# Altium PCB PCB1.PcbDoc (part 1 of 2)
Units mm, origin at the board's own origin, x right, y up, seen from the top; angles counter-clockwise.
Board outline 173.55 x 37.01 mm, 2 copper layers (Top Layer, Bottom Layer); 69 components, 61 nets, 220 pads, 230 vias.
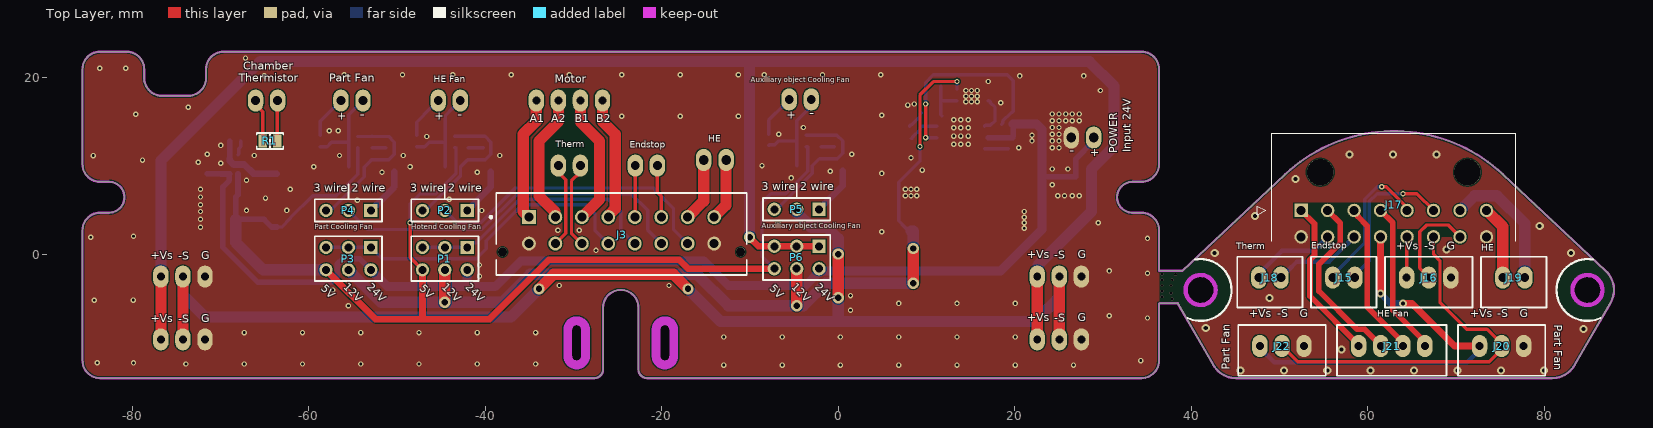
[diagram p0: Top Layer view]
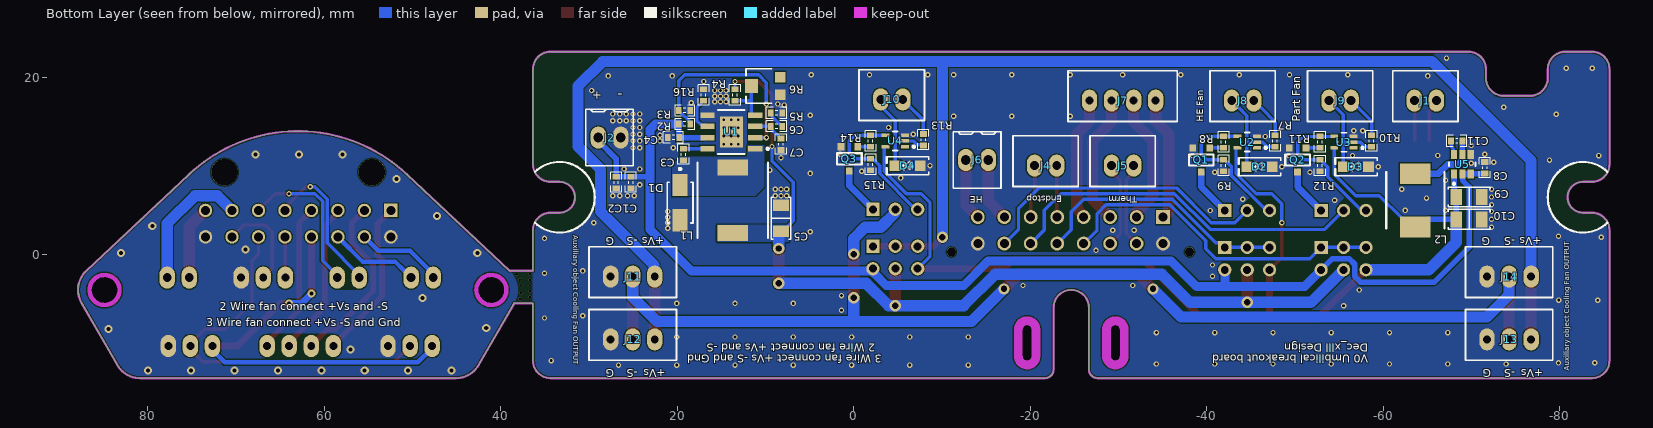
[diagram p1: Bottom Layer view, seen from below]
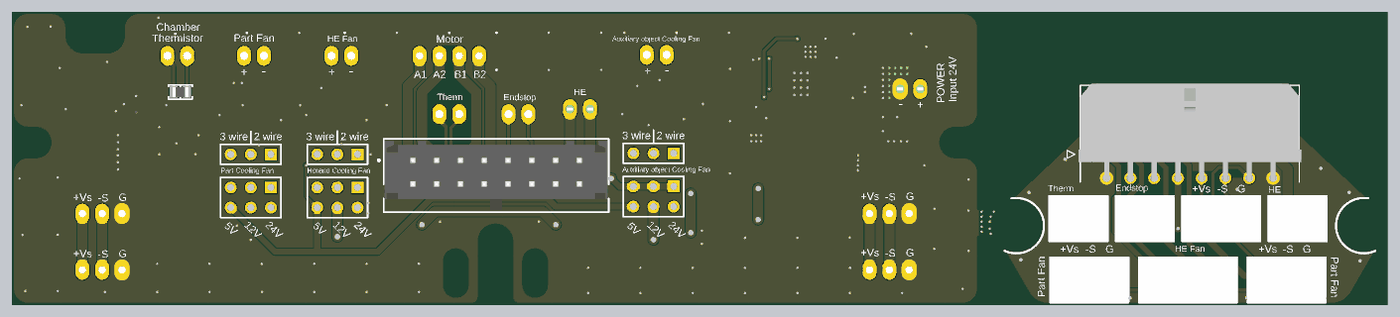
[diagram p3: 3D render of the assembled board from above, using the file's embedded part models]

## Layer stack, top to bottom
Top Solder: solder mask 0.0102, Solder Resist, Dk 3.5
Top Layer: signal copper 0.0356
Dielectric 1: dielectric 0.32, FR-4, Dk 4.8
Bottom Layer: signal copper 0.0356
Bottom Solder: solder mask 0.0102, Solder Resist, Dk 3.5

## Board outline
-85.638,-12.055 -85.638,2.695 cw(c-83.638,2.695) -83.638,4.695 -82.638,4.695 ccw(c-82.638,6.445) -82.638,8.195 -83.638,8.195 cw(c-83.638,10.195) -85.638,10.195 -85.638,20.945 cw(c-83.638,20.945) -83.638,22.945 -80.638,22.945 cw(c-80.638,20.945) -78.638,20.945 -78.638,19.945 ccw(c-76.638,19.945) -76.638,17.945 -73.638,17.945 ccw(c-73.638,19.945) -71.638,19.945 -71.638,20.945 cw(c-69.638,20.945) -69.638,22.945 34.362,22.945 cw(c34.362,20.945) 36.362,20.945 36.362,10.195 cw(c34.362,10.195) 34.362,8.195 33.362,8.195 ccw(c33.362,6.445) 33.362,4.695 34.362,4.695 cw(c34.362,2.695) 36.362,2.695 36.362,-1.876 39.019,-1.876 50.674,9.062 cw(c62.992,-4.064) 75.31,9.061 86.965,-1.876 cw(c84.912,-4.064) 87.51,-5.564 83.469,-12.564 cw(c80.871,-11.064) 80.871,-14.064 45.113,-14.064 cw(c45.113,-11.064) 42.515,-12.564 38.474,-5.564 38.481,-5.588 36.362,-5.588 36.362,-12.055 cw(c34.362,-12.055) 34.362,-14.055 -21.638,-14.055 cw(c-21.638,-13.055) -22.638,-13.055 -22.638,-6.055 ccw(c-24.638,-6.055) -26.638,-6.055 -26.638,-13.055 cw(c-27.638,-13.055) -27.638,-14.055 -83.638,-14.055 cw(c-83.638,-12.055)
cut-out: 39.372,-4.064 ccw(c41.072,-4.064) 41.072,-5.764 ccw(c41.072,-4.064) 42.772,-4.064 ccw(c41.072,-4.064) 41.072,-2.364 ccw(c41.072,-4.064)
cut-out: 83.212,-4.064 ccw(c84.912,-4.064) 84.912,-5.764 ccw(c84.912,-4.064) 86.612,-4.064 ccw(c84.912,-4.064) 84.912,-2.364 ccw(c84.912,-4.064)
cut-out: -20.638,-11.555 ccw(c-19.638,-11.555) -18.638,-11.555 -18.638,-8.555 ccw(c-19.638,-8.555) -20.638,-8.555
cut-out: -30.638,-11.555 ccw(c-29.638,-11.555) -28.638,-11.555 -28.638,-8.555 ccw(c-29.638,-8.555) -30.638,-8.555

## Design rules (kind name [scope] priority, off if disabled: settings)
Clearance "Stitching GND" [IsStitchingVia and InNet('GND') vs (IsVia and (Not IsStitchingVia)) Or IsPad] p1: gap=0.127 ignorepadtopadclearanceinfootprint=FALSE
Clearance Clearance_1 [InNamedPolygon('GND_L01_P008')] p2: gap=0.127 ignorepadtopadclearanceinfootprint=FALSE
Clearance Polygon_ANT [(InNamedPolygon('Top_Layer-GND')) or (InNamedPolygon('Bottom_Layer-GND')) vs InNet('RF')] p3: gap=0.127 ignorepadtopadclearanceinfootprint=FALSE except(0: Arc-Hole Track-Hole SMDPad-Hole THPad-Hole Via-Hole Fill-Hole Poly-Hole Region-Hole Text-Hole)
Clearance Polygon [(InNamedPolygon('Top_Layer-GND')) or (InNamedPolygon('Bottom_Layer-GND'))] p4: gap=0.127 ignorepadtopadclearanceinfootprint=FALSE
Clearance [All] p5: gap=0.127 ignorepadtopadclearanceinfootprint=FALSE
ComponentClearance [All] p1 off: gap=0.254 collisioncheckmode=3 verticalgap=0.254 showdistances=FALSE
DiffPairsRouting DiffPairsRouting_1 [InDifferentialPair ('SWD')] p1: maxlimit=0.254 minlimit=0.254 mostfreqgap=0.254 toplayer_minwidth=0.152 toplayer_maxwidth=0.305 toplayer_prefwidth=0.229 bottomlayer_minwidth=0.152 bottomlayer_maxwidth=0.305 bottomlayer_prefwidth=0.229 maxuncoupledlength=12.7
DiffPairsRouting [All] p2: maxlimit=0.254 minlimit=0.152 mostfreqgap=0.229 toplayer_minwidth=0.152 toplayer_maxwidth=0.305 toplayer_prefwidth=0.229 bottomlayer_minwidth=0.152 bottomlayer_maxwidth=0.305 bottomlayer_prefwidth=0.229 maxuncoupledlength=12.7
FabricationTestPointUsage TestPointUsage [All] p1: valid=0 allowmultiple=FALSE
FabricationTestpoint Testpoint [All] p1: side=3 testpointundercomponent=TRUE minsize=1.016 maxsize=2.54 preferedsize=1.524 minholesize=0 maxholesize=1.016 preferedholesize=0.813 testpointgrid=0.025 allowsidetop=TRUE allowsidebottom=TRUE usegrid=TRUE gridtolerance=0
Height [All] p1 off: minheight=0 maxheight=25.4 prefheight=12.7
HoleSize [All] p1: absolutevalues=TRUE maxlimit=4.064 minlimit=0.305 maxpercent=80.000 minpercent=20.000
LayerPairs [All] p1 off: enforce=TRUE
MatchedLengths [InDifferentialPair ('SWD')] p1: tolerance=25.4 checknetsindiffpair=TRUE checkdiffpairvsdiffpair=FALSE checkxsignals=FALSE checkothers=FALSE
MinimumAnnularRing [All] p1 off: minimumring=0.152
PolygonConnect PolygonConnect_24 [All vs IsNamedPolygon('NONET_L-01_P-001')] p1: connectstyle=Direct reliefconductorwidth=0.254 reliefentries=4 polygonreliefangle="90 Angle" airgapwidth=0.254
PolygonConnect PolygonConnect_23 [All vs IsNamedPolygon('NONET_L-01_P-001')] p2: connectstyle=Direct reliefconductorwidth=0.254 reliefentries=4 polygonreliefangle="90 Angle" airgapwidth=0.254
PolygonConnect PolygonConnect_1 [All vs IsNamedPolygon('NONET_L-01_P-001')] p3: connectstyle=Direct reliefconductorwidth=0.254 reliefentries=4 polygonreliefangle="90 Angle" airgapwidth=0.254
PolygonConnect PolygonConnect_22 [All vs IsNamedPolygon('NONET_L04_P024')] p4: connectstyle=Direct reliefconductorwidth=0.254 reliefentries=4 polygonreliefangle="90 Angle" airgapwidth=0.254
PolygonConnect PolygonConnect_21 [All vs IsNamedPolygon('NONET_L03_P028')] p5: connectstyle=Direct reliefconductorwidth=0.254 reliefentries=4 polygonreliefangle="90 Angle" airgapwidth=0.254
PolygonConnect PolygonConnect_20 [All vs IsNamedPolygon('NONET_L02_P026')] p6: connectstyle=Direct reliefconductorwidth=0.254 reliefentries=4 polygonreliefangle="90 Angle" airgapwidth=0.254
PolygonConnect PolygonConnect_19 [All vs IsNamedPolygon('NONET_L01_P023')] p7: connectstyle=Direct reliefconductorwidth=0.254 reliefentries=4 polygonreliefangle="90 Angle" airgapwidth=0.254
PolygonConnect PolygonConnect_18 [All vs IsNamedPolygon('NONET_L02_P024')] p8: connectstyle=Direct reliefconductorwidth=0.254 reliefentries=4 polygonreliefangle="90 Angle" airgapwidth=0.254
PolygonConnect PolygonConnect_17 [All vs IsNamedPolygon('NONET_L02_P022')] p9: connectstyle=Direct reliefconductorwidth=0.254 reliefentries=4 polygonreliefangle="90 Angle" airgapwidth=0.254
PolygonConnect PolygonConnect_16 [All vs IsNamedPolygon('NONET_L01_P020')] p10: connectstyle=Direct reliefconductorwidth=0.254 reliefentries=4 polygonreliefangle="90 Angle" airgapwidth=0.254
PolygonConnect PolygonConnect_15 [All vs IsNamedPolygon('NONET_L02_P018')] p11: connectstyle=Direct reliefconductorwidth=0.254 reliefentries=4 polygonreliefangle="90 Angle" airgapwidth=0.254
PolygonConnect PolygonConnect_14 [All vs IsNamedPolygon('NONET_L01_P020')] p12: connectstyle=Direct reliefconductorwidth=0.254 reliefentries=4 polygonreliefangle="90 Angle" airgapwidth=0.254
PolygonConnect PolygonConnect_13 [All vs IsNamedPolygon('NONET_L02_P018')] p13: thpad.connectstyle=NoConnect thpad.reliefconductorwidth=0.254 thpad.reliefentries=4 thpad.polygonreliefangle="90 Angle" thpad.airgapwidth=0.254 smdpad.connectstyle=Direct smdpad.reliefconductorwidth=0.254 smdpad.reliefentries=4 smdpad.polygonreliefangle="90 Angle" smdpad.airgapwidth=0.254 via.connectstyle=Direct via.reliefconductorwidth=0.254 via.reliefentries=4 via.polygonreliefangle="90 Angle" via.airgapwidth=0.254
PolygonConnect PolygonConnect_12 [All vs IsNamedPolygon('NONET_L01_P016')] p14: connectstyle=Direct reliefconductorwidth=0.254 reliefentries=4 polygonreliefangle="90 Angle" airgapwidth=0.254
PolygonConnect PolygonConnect_11 [All vs IsNamedPolygon('GND_L01_P008')] p15: connectstyle=Direct reliefconductorwidth=0.254 reliefentries=4 polygonreliefangle="90 Angle" airgapwidth=0.254
PolygonConnect PolygonConnect_10 [All vs IsNamedPolygon('GND_L01_P008')] p16: thpad.connectstyle=NoConnect thpad.reliefconductorwidth=0.254 thpad.reliefentries=4 thpad.polygonreliefangle="90 Angle" thpad.airgapwidth=0.254 smdpad.connectstyle=Direct smdpad.reliefconductorwidth=0.254 smdpad.reliefentries=4 smdpad.polygonreliefangle="90 Angle" smdpad.airgapwidth=0.254 via.connectstyle=Direct via.reliefconductorwidth=0.254 via.reliefentries=4 via.polygonreliefangle="90 Angle" via.airgapwidth=0.254
PolygonConnect PolygonConnect_9 [All vs IsNamedPolygon('VUSB_L01_P010')] p17: connectstyle=Direct reliefconductorwidth=0.254 reliefentries=4 polygonreliefangle="90 Angle" airgapwidth=0.254
PolygonConnect PolygonConnect_8 [All vs IsNamedPolygon('GND_L01_P008')] p18: connectstyle=Direct reliefconductorwidth=0.254 reliefentries=4 polygonreliefangle="90 Angle" airgapwidth=0.254
PolygonConnect PolygonConnect_7 [All vs IsNamedPolygon('NONET_L02_P014')] p19: connectstyle=Direct reliefconductorwidth=0.254 reliefentries=4 polygonreliefangle="90 Angle" airgapwidth=0.254
PolygonConnect PolygonConnect_6 [All vs IsNamedPolygon('GND_L02_P006')] p20: connectstyle=Direct reliefconductorwidth=0.254 reliefentries=4 polygonreliefangle="90 Angle" airgapwidth=0.254
PolygonConnect PolygonConnect_5 [All vs IsNamedPolygon('GND_L01_P004')] p21: connectstyle=Direct reliefconductorwidth=0.254 reliefentries=4 polygonreliefangle="90 Angle" airgapwidth=0.254
PolygonConnect PolygonConnect_4 [All vs IsNamedPolygon('Top Layer-NetR6_2')] p22: connectstyle=Direct reliefconductorwidth=0.254 reliefentries=4 polygonreliefangle="90 Angle" airgapwidth=0.254
PolygonConnect PolygonConnect_3 [All vs IsNamedPolygon('1')] p23: connectstyle=Direct reliefconductorwidth=0.254 reliefentries=4 polygonreliefangle="90 Angle" airgapwidth=0.254
PolygonConnect PolygonConnect_2 [All vs IsNamedPolygon('Top Layer-GND')] p24: connectstyle=Direct reliefconductorwidth=0.254 reliefentries=4 polygonreliefangle="90 Angle" airgapwidth=0.254
PolygonConnect [All] p25: connectstyle=Relief reliefconductorwidth=0.254 reliefentries=4 polygonreliefangle="90 Angle" airgapwidth=0.254
RoutingVias [All] p1: holewidth=0.406 width=0.813 viastyle="Through Hole" minholewidth=0.254 minwidth=0.254 maxholewidth=0.711 maxwidth=1.27
SilkToSolderMaskClearance SilkscreenOverComponentPads [IsPad] p1: minsilkscreentomaskgap=0.254 clearancetoexposedcopper=TRUE
SolderMaskExpansion [All] p1: expansion=0.076 istentingtop=FALSE
Width [All] p1: maxlimit=1.524 minlimit=0.152 preferedwidth=0.381
22 further rules are at their usual default settings.

## Classes and differential pairs
component class Minor_board: J15 J16 J17 J18 J19 J20 J21 J22
component class main_board: C1 C2 C3 C4 C5 C6 C7 C8 C9 C10 C11 D1 D2 D3 D4 J1 J2 J3 J4 J5 J6 J7 J8 J9 J10 J11 J12 J13 J14 L1 L2 P1 P2 P3 P4 P5 P6 Q1 Q2 Q3 R1 R2 R3 R4 R5 R6 R7 R8 R9 R10 R11 R12 R13 R14 R15 R16 U1 U2 U3 U4 U5

## Components (designator, comment, footprint, x,y, rotation, side; value= is the part's Value field where it differs from the comment)
C1 "1uF" "0603 R" 25.273,8.128 r180 bottom
C2 "0.1uF" "0603 R" 26.924,8.128 r180 bottom
C3 "100nF" "0603 R" 19.304,11.303 r180 bottom
C4 "10uF/50V" "0603 R" 20.447,13.208 r270 bottom
C5 "22 µF" "CAP 1206_3216 - 0.8MM" 8.255,4.064 r270 bottom
C6 "150pF" "0603 R" 8.763,14.478 r90 bottom
C7 "NS" "0603 R" 8.255,12.446 r180 bottom
C8 "10uF/50V" "0603 R" -71.501,9.779 r0 bottom
C9 "22 µF" "CAP 1206_3216 - 0.8MM" -69.723,6.477 r0 bottom
C10 "22 µF" "CAP 1206_3216 - 0.8MM" -69.723,3.937 r0 bottom
C11 "100nF" "0603 R" -68.326,12.827 r270 bottom
D1 "B340A-13-F" FP-SMA-MFG 19.685,5.842 r270 bottom
D2 "KDZVTR3.0B" SOD123F -45.974,9.906 r0 bottom
D3 "KDZVTR3.0B" SOD123F -56.896,9.906 r0 bottom
D4 "KDZVTR3.0B" SOD123F -6.096,10.033 r0 bottom
J1 "B2B-XH-A(LF)(SN)" "JST XH B2B-XH-A" -64.77,17.399 r0 bottom
J2 "282834-2" "TE 282834-2" 27.686,13.208 r180 bottom
J3 "43045-1612" FP-43045-1612-MFG -24.549,2.279 r180 top
J4 "B2B-XH-A(LF)(SN)" "JST XH B2B-XH-A" -21.737,10.033 r0 bottom
J5 "B2B-XH-A(LF)(SN)" "JST XH B2B-XH-A" -30.46,10.033 r0 bottom
J6 "282834-2" "TE 282834-2" -13.97,10.668 r180 bottom
J7 "B4B-XH-A(LF)(SN)" "JST XH B4B-XH-A" -30.46,17.399 r0 bottom
J8 "B2B-XH-A(LF)(SN)" "JST XH B2B-XH-A" -44.069,17.399 r0 bottom
J9 "B2B-XH-A(LF)(SN)" "JST XH B2B-XH-A" -55.098,17.399 r0 bottom
J10 "B2B-XH-A(LF)(SN)" "JST XH B2B-XH-A" -4.298,17.526 r0 bottom
J11 "B3B-XH-A(LF)(SN)" "JST XH B3B-XH-A" 25.059,-2.54 r0 bottom
J12 "B3B-XH-A(LF)(SN)" "JST XH B3B-XH-A" 25.059,-9.652 r0 bottom
J13 "B3B-XH-A(LF)(SN)" "JST XH B3B-XH-A" -74.255,-9.652 r0 bottom
J14 "B3B-XH-A(LF)(SN)" "JST XH B3B-XH-A" -74.255,-2.54 r0 bottom
J15 "B2B-XH-A(LF)(SN)" "JST XH B2B-XH-A" 57.297,-2.667 r0 top locked
J16 "B3B-XH-A(LF)(SN)" "JST XH B3B-XH-A" 66.929,-2.667 r0 top locked
J17 "43045-1600" 43045-16(00,01,02,10) 52.468,4.953 r180 top locked
J18 "B2B-XH-A(LF)(SN)" "JST XH B2B-XH-A" 48.915,-2.667 r0 top locked
J19 "B2B-XH-A(LF)(SN)" "JST XH B2B-XH-A" 76.561,-2.667 r0 top locked
J20 "B3B-XH-A(LF)(SN)" "JST XH B3B-XH-A" 75.184,-10.414 r0 top locked
J21 "B4B-XH-A(LF)(SN)" "JST XH B4B-XH-A" 62.738,-10.414 r0 top locked
J22 "B3B-XH-A(LF)(SN)" "JST XH B3B-XH-A" 50.292,-10.414 r0 top locked
L1 "22uH" "0850 I" 13.716,6.096 r90 bottom
L2 "4.7uH" "0630 I" -63.627,6.096 r270 bottom
P1 "Header 3X2" HDR2X3 -42.037,0.762 r180 top
P2 "Header 3" HDR1X3 -42.037,4.953 r180 top
P3 "Header 3X2" HDR2X3 -52.959,0.762 r180 top
P4 "Header 3" HDR1X3 -52.959,4.953 r180 top
P5 "Header 3" HDR1X3 -2.159,5.08 r180 top
P6 "Header 3X2" HDR2X3 -2.159,0.889 r180 top
Q1 "ACE3400" SOT23-3 -39.37,10.668 r0 bottom
Q2 "ACE3400" SOT23-3 -50.292,10.668 r0 bottom
Q3 "ACE3400" SOT23-3 0.508,10.795 r0 bottom
R1 "10k" "NTC 0805_2012" -64.389,12.827 r180 top
R2 "47K" "0603 R" 19.177,14.732 r270 bottom
R3 "3.3K" "0603 R" 19.177,16.256 r270 bottom
R4 "56K" "0603 R" 13.462,18.034 r180 bottom
R5 "147K" "0603 R" 8.763,16.002 r270 bottom
R6 "TC33X-2-502E" FP-TC33X-2-MFG 10.033,19.05 r90 bottom
R7 "560R" "0603 R" -47.752,12.827 r180 bottom
R8 "10R" "0603 R" -41.91,12.7 r180 bottom
R9 "20K" "0603 R" -41.91,10.048 r180 bottom
R10 "560R" "0603 R" -58.674,12.827 r180 bottom
R11 "10R" "0603 R" -52.832,12.7 r180 bottom
R12 "20K" "0603 R" -52.832,10.033 r180 bottom
R13 "560R" "0603 R" -7.874,12.954 r180 bottom
R14 "10R" "0603 R" -1.905,12.827 r180 bottom
R15 "20K" "0603 R" -1.905,10.16 r180 bottom
R16 "100K" "0603 R" 17.018,18.034 r180 bottom
U1 "MP1584EN-LF-Z" FP-MP1584EN-LF-Z-MFG 13.876,13.843 r0 bottom
U2 "SN74AHC1G04DCKR" FP-DCK0005A-MFG -44.577,12.7 r0 bottom
U3 "SN74AHC1G04DCKR" FP-DCK0005A-MFG -55.542,12.685 r0 bottom
U4 "SN74AHC1G04DCKR" FP-DCK0005A-MFG -4.699,12.827 r0 bottom
U5 "AP63205WU-7" FP-TSOT26-MFG -68.961,10.176 r90 bottom

## Footprints (in the part's own frame and the unit in brackets; to place one, negate y for a bottom-side part, rotate by r counter-clockwise, add the part's x,y. Pads: shape width x height; smd on the part's side, far side on the other; paste and mask are expansions set on the pad)
"0603 R" [mm] "1/10W"
  rect 0.8x0.65 smd mask+0.1: 1(0,-0.65) 2(0,0.65)
  silkscreen extent -0.64,-1.14 0.64,1.14, body extent -0.4,-0.8 0.4,0.8, height 0.4
"0630 I" [mm] "Inductor"
  rect 2.35x3.5 smd: 1(-3.025,0) 2(3.025,0)
  silkscreen extent -3.18,-3.3 3.18,3.3, body extent -3.18,-3.3 3.18,3.3, height 3
"0850 I" [mm]
  rect 1.8x3.5 smd: 1(3.7,0) 2(-3.7,0)
  silkscreen extent -4.25,-4 4.25,4, body extent -4.28,-4 4.28,4, height 5
43045-16(00,01,02,10) [mm]
  rect 1.52x1.52 hole 1.02: 1(0,0)
  round 1.52 hole 1.02: 2(-3,0) 3(-6,0) 4(-9,0) 5(-12,0) 6(-15,0) 7(-18,0) 8(-21,0) 9(0,3) 10(-3,3) 11(-6,3) 12(-9,3) 13(-12,3) 14(-15,3) 15(-18,3) 16(-21,3)
  round 3 hole 3 unplated: 17(-2.16,-4.32) 18(-18.84,-4.32)
  silkscreen extent -24.33,-8.72 5,3.52, body extent -24.58,-8.92 3.57,3.31, height 8.27
"CAP 1206_3216 - 0.8MM" [mm] "Chip Capacitor, 2-Leads, Body 3.25x1.60mm, IPC Medium Density"
  rect 1.3x1.8 smd: 1(-1.45,0) 2(1.45,0)
  silkscreen extent -2.38,-1.12 2.37,1.12, body extent -1.6,-0.8 1.6,0.8, height 0.8
FP-43045-1612-MFG [mm]
  rect 1.57x1.57 hole 1.02 paste-1000 mask+0: 1(10.5,-1.915)
  round 1.57 hole 1.02 paste-1000 mask+0: 2(7.5,-1.915) 3(4.5,-1.915) 4(1.5,-1.915) 5(-1.5,-1.915) 6(-4.5,-1.915) 7(-7.5,-1.915) 8(-10.5,-1.915) 9(10.5,1.085) 10(7.5,1.085) 11(4.5,1.085) 12(1.5,1.085) 13(-1.5,1.085) 14(-4.5,1.085) 15(-7.5,1.085) 16(-10.5,1.085)
  round 1.02 hole 1.02 unplated paste-1000 mask+0: ""(-13.5,2.025) ""(13.5,2.025)
  silkscreen extent -14.2,-4.63 14.92,4.63, body extent -14.3,-4.74 14.3,4.73, height 0.25
FP-DCK0005A-MFG [mm]
  rect 0.9x0.4 smd paste-1000 mask+0: 1(-1.1,0.65) 2(-1.1,0) 3(-1.1,-0.65) 4(1.1,-0.65) 5(1.1,0.65)
  silkscreen extent -2.22,-1.07 0.7,1.07, body extent -1.1,-1 1.1,1, height 1.1
FP-MP1584EN-LF-Z-MFG [mm]
  rect 1.6x0.61 smd paste+0 mask+0: 1(-2.7,1.905) 2(-2.7,0.635) 3(-2.7,-0.635) 4(-2.7,-1.905) 5(2.7,-1.905) 6(2.7,-0.635) 7(2.7,0.635) 8(2.7,1.905)
  rect 2.62x3.51 smd paste+0 mask+0: 9(0,0)
  silkscreen extent -4.22,-2.5 1.53,2.5, body extent -3.1,-2.51 3.1,2.49, height 1.7
FP-SMA-MFG [mm]
  rect 2.5x1.7 smd mask+0: 1(-2,0)
  rect 2.5x1.7 smd paste+0 mask+0: 2(2,0)
  silkscreen extent -3.92,-1.46 2.3,1.46, body extent -2.6,-1.3 2.6,1.3, height 2.4
FP-TC33X-2-MFG [mm]
  rect 1.2x1.2 smd paste+0 mask+0: 1(-1,-1.675) 3(1,-1.675)
  rect 1.6x1.5 smd paste+0 mask+0: 2(0,1.575)
  silkscreen extent -1.95,-0.7 1.95,2.17, body extent -1.8,-1.9 1.8,1.9, height 1.5
FP-TSOT26-MFG [mm]
  rect 1x0.7 smd paste+0 mask+0: 1(-1.1,0.95) 2(-1.1,0) 3(-1.099,-0.95) 4(1.1,-0.95) 5(1.1,0) 6(1.099,0.95)
  silkscreen extent -2.32,-1.5 0.22,1.5, body extent -1.4,-1.45 1.4,1.45, height 1
HDR1X3 [mm] "Connector; Header; 3 Position"
  rect 1.5x1.5 hole 0.9: 1(0,0)
  round 1.5 hole 0.9: 2(2.54,0) 3(5.08,0)
  silkscreen extent -1.27,-1.27 6.35,1.27
HDR2X3 [mm] "Connector; Header; 3x2 Position"
  rect 1.5x1.5 hole 0.9: 1(0,0)
  round 1.5 hole 0.9: 2(0,2.54) 3(2.54,0) 4(2.54,2.54) 5(5.08,0) 6(5.08,2.54)
  silkscreen extent -1.27,-1.27 6.35,3.81
"JST XH B2B-XH-A" [mm]
  oval 1.75x2.5 hole 1: 1(-1.25,0) 2(1.25,0)
  silkscreen extent -3.7,-3.38 3.7,2.38, body extent -3.7,-3.37 3.7,2.38, height 7
"JST XH B3B-XH-A" [mm]
  oval 1.75x2.5 hole 0.9: 1(-2.5,0) 2(0,0) 3(2.5,0)
  silkscreen extent -4.95,-3.38 4.95,2.38, body extent -4.95,-3.37 4.95,2.38, height 7
"JST XH B4B-XH-A" [mm]
  oval 1.75x2.5 hole 0.9: 1(-3.75,0) 2(-1.25,0) 3(1.25,0) 4(3.75,0)
  silkscreen extent -6.2,-3.38 6.2,2.38, body extent -6.2,-3.37 6.2,2.38, height 7
"NTC 0805_2012" [mm] "Chip Thermistor, 2-Leads, Body 2.00x1.25mm, IPC Medium Density"
  rect 1x1.45 smd: 1(-0.825,0) 2(0.825,0)
  silkscreen extent -1.5,-0.9 1.5,0.9, body extent -1,-0.64 1,0.64, height 1.27
SOD123F [mm] "SODFL, 2-Leads, Body 1.60x3.50mm, IPC Medium Density"
  rect 1.2x1.2 smd: 1(-1.43,0) 2(1.43,0)
  silkscreen extent -2.41,-1.02 2.41,1.02, body extent -1.75,-0.8 1.75,0.8, height 1.1
SOT23-3 [mm]
  rect 0.77x0.8 smd: 1(-0.96,-1.37) 2(0.96,-1.37) 3(0,1.37)
  silkscreen extent -1.4,-0.64 1.4,0.64, body extent -1.4,-1.52 1.4,1.4, height 1
"TE 282834-2" [mm]
  oval 1.75x2.5 hole 1.1: 1(-1.27,0) 2(1.27,0)
  silkscreen extent -2.7,-3.2 2.7,3.2, body extent -2.77,-3.25 2.77,3.25, height 10

## Part data
C1 C2 C3 C4 C6 C7 C8 C11: library part Capacitors
C5 C9 C10: library part GRM31CC81E226KE11L, "CAP CER 22UF 25V X6S 1206", Device Package="1206 (3216 Metric)", Manufacturer="Murata Electronics", Operating Temperature="-55°C ~ 105°C", Supplier Part Number 1=490-14468-1-ND, Temperature Coefficient=X6S, Tolerance=±10%, Voltage - Rated=25V, Applications="General Purpose", Capacitance="22 µF", ComponentLink1Description=Datasheet, ComponentLink1URL=https://search.murata.co.jp/Ceramy/image/img/A01X/G101/ENG/GRM31CC81E226KE11-01.pdf, ComponentLink2Description="DigiKey Link", ComponentLink2URL=https://www.digikey.com/en/products/detail/murata-electronics/GRM31CC81E226KE11L/6606097, LastUpdated="2022/9/19 下午 01:06:42", Lifecycle Status=Active, Minimum Order=1, Mounting Type="Surface Mount, MLCC", Package / Case="1206 (3216 Metric)", Packaging=TapeAndReel, Part Number=GRM31CC81E226KE11L, Part Status=Active, PartId=31407, Price=0.33, Series=GRM, Size / Dimension="0.126\" L x 0.063\" W (3.20mm x 1.60mm)", Supplier 1=DigiKey, Thickness (Max)="0.075\" (1.90mm)"
D1: library part CMP-1667-00003-3, "DIODE SCHOTTKY 40V 3A SMA", Average Rectified Current=3A, Capacitance=250pF, Case/Package=SMA, Forward Voltage=500mV, Max Forward Surge Current (Ifsm)=80A, Max Operating Temperature=125°C, Max Repetitive Reverse Voltage (Vrrm)=40V, Max Reverse Current=500uA, Min Operating Temperature=-55°C, Package Quantity=5000, Contact Plating=Tin, Current=3A, Current Rating=3A, Element Configuration=Single, Forward Current=3A, Height=2.3mm, Lead Free="Lead Free", Length=4.6mm, Max Reverse Voltage (DC)=40V, Mount="Surface Mount", Number of Pins=2, Output Current=3A, Packaging="Tape and Reel", Peak Non-Repetitive Surge Current=80A, Polarity=Standard, Radiation Hardening=No, REACH SVHC="No SVHC", RoHS Compliant=Yes, Series=-, Termination=SMD/SMT, Voltage=40V, Voltage Rating (DC)=40V, Weight=0.002258oz, Width=2.92mm
D2 D3 D4: "DIODE ZENER 3V 1W PMDU", Current - Reverse Leakage @ Vr="100 µA @ 1 V", Manufacturer="Rohm Semiconductor", Operating Temperature="150°C (TJ)", Package / Case=SOD-123F, Power - Max="1 W", Supplier Device Package=PMDU, Supplier Part Number 1=846-KDZVTR3.0BCT-ND, Tolerance=±6.67%, Voltage - Zener (Nom) (Vz)="3 V", ComponentLink1Description=Datasheet, ComponentLink1URL=https://www.rohm.com/datasheet/KDZV3.0B/kdzvtr3.0b-e, ComponentLink2Description="DigiKey Link", ComponentLink2URL=https://www.digikey.com/en/products/detail/rohm-semiconductor/KDZVTR3-0B/10670957, LastUpdated="2022/9/19 下午 01:47:27", Lifecycle Status=Active, Minimum Order=1, Mounting Type="Surface Mount", Packaging=TapeAndReel, Part Number=KDZVTR3.0B, Part Status=Active, PartId=4172, Price=0.11, Series=-, Supplier 1=DigiKey
J1 J4 J5 J8 J9 J10 J15 J18 J19: "CONN HEADER VERT 2POS 2.5MM", Current Rating (Amps)=3A, Insulation Color=Natural, Manufacturer="JST Sales America Inc.", Material Flammability Rating="UL94 V-0", Operating Temperature="-25°C ~ 85°C", Supplier Part Number 1=455-2247-ND, Voltage Rating=250V, ComponentLink1Description=Datasheet, ComponentLink1URL=http://www.jst-mfg.com/product/pdf/eng/eXH.pdf, ComponentLink2Description="DigiKey Link", ComponentLink2URL=http://digikey.com/product-detail/en/jst-sales-america-inc/B2B-XH-A-LF-SN/455-2247-ND/1651045, Connector Type=Header, Contact Finish - Mating=Tin, Contact Finish - Post=Tin, Contact Length - Post="0.134\" (3.40mm)", Contact Material=Brass, Contact Shape=Square, Contact Type="Male Pin", Fastening Type="Detent Lock", Insulation Height="0.276\" (7.00mm)", Insulation Material="Polyamide (PA66), Nylon 6/6", LastUpdated="2020/1/12 下午 11:46:08", Lifecycle Status=Active, Minimum Order=1, Mounting Type="Through Hole", Number of Positions=2, Number of Positions Loaded=All, Number of Rows=1, Packaging=Bulk, Part Number=B2B-XH-A(LF)(SN), Part Status=Active, PartId=67, Pitch - Mating="0.098\" (2.50mm)", Price=0.15, Series=XH, Shrouding="Shrouded - 4 Wall", Style="Board to Cable/Wire", Supplier 1=DigiKey, Termination="Press-Fit, Solder"
J2 J6: "TERM BLK 2P SIDE ENT 2.54MM PCB", Color=Green, Current=10A, Manufacturer="TE Connectivity AMP Connectors", Supplier Part Number 1=A98333-ND, Voltage=150V, ComponentLink1Description=Datasheet, ComponentLink1URL=https://www.te.com/commerce/DocumentDelivery/DDEController?Action=srchrtrv&DocNm=282834&DocType=Customer+Drawing&DocLang=English, ComponentLink2Description="DigiKey Link", ComponentLink2URL=http://digikey.com/product-detail/en/te-connectivity-amp-connectors/282834-2/A98333-ND/1150135, LastUpdated="2020/1/15 上午 04:15:38", Lifecycle Status=Active, Mating Orientation="Horizontal with Board", Minimum Order=1, Mounting Type="Through Hole", Number of Levels=1, Packaging=Bulk, Part Number=282834-2, Part Status=Active, Pitch="0.100\" (2.54mm)", Positions Per Level=2, Price=0.88, Series=Buchanan, Supplier 1=DigiKey, Wire Gauge="16-30 AWG", Wire Termination="Screw - Rising Cage Clamp"
J3: library part CMP-04776-000281-1, "CONN HEADER VERT 16POS 3MM", Color=Black, Contact Resistance=10mR, Current Rating=5A, Flammability Rating="UL94 V-0", Insulation Resistance=1GR, Max Operating Temperature=105°C, Max Voltage Rating (DC)=250.25kV, Min Operating Temperature=-40°C, Operating Supply Voltage=250V, Package Quantity=792, Voltage Rating=600V, Approvals=UL, Connector Type=Power, Contact Material=Brass, Contact Plating=Tin, Depth=8.77mm, Gender=Male, Glow Wire Compliant=Compliant, Halogen Free="Low Halogen", Height=9.91mm, Housing Color=Black, Housing Material=Thermoplastic, Lead Free="Lead Free", Length=28.15mm, Material=Polyester, Mating Cycles=30, Max Current Rating=5A, Mount="Through Hole", Number of Circuits=16, Number of Contacts=16, Number of Poles=16, Number of Positions=16, Number of Rows=2, Orientation=Vertical, Packaging=Tray, Pitch=3mm, REACH SVHC="No SVHC", RoHS Compliant=Yes, Row Spacing=3mm, Series=43045, Termination=Solder, Voltage Rating (AC)=250V, Voltage Rating (DC)=250V, Working Voltage=250V
J7 J21: "CONN HEADER VERT 4POS 2.5MM", Current Rating (Amps)=3A, Insulation Color=Natural, Manufacturer="JST Sales America Inc.", Material Flammability Rating="UL94 V-0", Operating Temperature="-25°C ~ 85°C", Supplier Part Number 1=455-2249-ND, Voltage Rating=250V, ComponentLink1Description=Datasheet, ComponentLink1URL=http://www.jst-mfg.com/product/pdf/eng/eXH.pdf, ComponentLink2Description="DigiKey Link", ComponentLink2URL=http://digikey.com/product-detail/en/jst-sales-america-inc/B4B-XH-A-LF-SN/455-2249-ND/1651047, Connector Type=Header, Contact Finish - Mating=Tin, Contact Finish - Post=Tin, Contact Length - Post="0.134\" (3.40mm)", Contact Material=Brass, Contact Shape=Square, Contact Type="Male Pin", Fastening Type="Detent Lock", Insulation Height="0.276\" (7.00mm)", Insulation Material="Polyamide (PA66), Nylon 6/6", LastUpdated="2020/1/12 下午 11:46:34", Lifecycle Status=Active, Minimum Order=1, Mounting Type="Through Hole", Number of Positions=4, Number of Positions Loaded=All, Number of Rows=1, Packaging=Bulk, Part Number=B4B-XH-A(LF)(SN), Part Status=Active, PartId=69, Pitch - Mating="0.098\" (2.50mm)", Price=0.21, Series=XH, Shrouding="Shrouded - 4 Wall", Style="Board to Cable/Wire", Supplier 1=DigiKey, Termination="Press-Fit, Solder"
J11 J12 J13 J14 J16 J20 J22: "CONN HEADER VERT 3POS 2.5MM", Current Rating (Amps)=3A, Insulation Color=Natural, Manufacturer="JST Sales America Inc.", Material Flammability Rating="UL94 V-0", Operating Temperature="-25°C ~ 85°C", Supplier Part Number 1=455-2248-ND, Voltage Rating=250V, ComponentLink1Description=Datasheet, ComponentLink1URL=http://www.jst-mfg.com/product/pdf/eng/eXH.pdf, ComponentLink2Description="DigiKey Link", ComponentLink2URL=http://digikey.com/product-detail/en/jst-sales-america-inc/B3B-XH-A-LF-SN/455-2248-ND/1651046, Connector Type=Header, Contact Finish - Mating=Tin, Contact Finish - Post=Tin, Contact Length - Post="0.134\" (3.40mm)", Contact Material=Brass, Contact Shape=Square, Contact Type="Male Pin", Fastening Type="Detent Lock", Insulation Height="0.276\" (7.00mm)", Insulation Material="Polyamide (PA66), Nylon 6/6", LastUpdated="2020/1/12 下午 11:46:22", Lifecycle Status=Active, Minimum Order=1, Mounting Type="Through Hole", Number of Positions=3, Number of Positions Loaded=All, Number of Rows=1, Packaging=Bulk, Part Number=B3B-XH-A(LF)(SN), Part Status=Active, PartId=68, Pitch - Mating="0.098\" (2.50mm)", Price=0.19, Series=XH, Shrouding="Shrouded - 4 Wall", Style="Board to Cable/Wire", Supplier 1=DigiKey, Termination="Press-Fit, Solder"
J17: "Connector", Manufacturer_Name=Molex, Mouser Part Number=538-43045-1600, Datasheet Link=https://www.molex.com/pdm_docs/sd/430450200_sd.pdf, Height=8.77mm, Manufacturer_Part_Number=43045-1600, Mouser Price/Stock=https://www.mouser.co.uk/ProductDetail/Molex/43045-1600?qs=SeTnVz%252B%252BFGBdrqGVXFHXvQ%3D%3D
L1 L2: library part Inductor
P1 P3 P6: "Header, 3-Pin, Dual row", LatestRevisionDate=17-Jul-2002, LatestRevisionNote="Re-released for DXP Platform.", Publisher="Altium Limited"
P2 P4 P5: "Header, 3-Pin", LatestRevisionDate=17-Jul-2002, LatestRevisionNote="Re-released for DXP Platform.", Publisher="Altium Limited"
R1: library part NTCG203NF103JTDS, "CASE EIA 0805 B= 1% ,10K? 5%", B Value Tolerance=±1%, Manufacturer="TDK Corporation", Operating Temperature="-40°C ~ 125°C", Package / Case="0805 (2012 Metric)", Power - Max=100mW, Resistance Tolerance=±5%, Supplier Part Number 1=445-NTCG203NF103JTTR-ND, B25/50=3590K, B25/75=3635K, B25/85=3650K, B25/100=3670K, ComponentLink2Description="DigiKey Link", ComponentLink2URL=http://digikey.com/product-detail/en/tdk-corporation/NTCG203NF103JTDS/445-NTCG203NF103JTTR-ND/10820112, LastUpdated="2020/8/30 下午 09:02:56", Lifecycle Status=Active, Minimum Order=2000, Mounting Type="Surface Mount", Packaging=TapeAndReel, Part Number=NTCG203NF103JTDS, PartId=1371, Price=0.13, Resistance in Ohms @ 25°C=10k, Series=NTCG, Supplier 1=DigiKey
R2 R3 R4 R5 R7 R8 R9 R10 R11 R12 R13 R14 R15 R16: library part Resistors
R6: library part CMP-07234-000040-1, "TRIMMER 5K OHM 0.1W J LEAD TOP", Color=Silver, Max Operating Temperature=100°C, Max Power Dissipation=100mW, Min Operating Temperature=-40°C, Package Quantity=2500, Resistance=100kR, Resistance Tolerance=25%, Resistor Type=Carbon, Temperature Coefficient=250ppm/°C, Voltage Rating (DC)=50V, Depth=3.8mm, Height=0.047inch, Length=3mm, Military Standard=Not, Mount="Surface Mount", Number of Turns=1, Packaging="Tape and Reel", Power Rating=100mW, Radiation Hardening=No, REACH SVHC="No SVHC", RoHS Compliant=Yes, Series=TC33, Termination="Foot Print", Tolerance=25%, Weight=29.4mg, Width=0.118inch
U1: library part CMP-57379-000006-1, "IC REG BUCK ADJ 3A", Ambient Temperature Range High=+85°C, Ambient Temperature Range Low=-20°C, Manufacturer="Monolithic Power Systems", Max Junction Temp=+125°C, Max Power Dissipation=2.5W, Max Supply Voltage=28V, Min Supply Voltage=4.5V, Nominal Supply Current=100uA, Output Current=3A, Output Voltage=0.8-25V, Switching Frequency=100-1500kHz, Temperature="-20°C to +125°C", Automotive=No, Category=IC, ComponentLink2Description=Datasheet, ComponentLink2URL=https://www.monolithicpower.com/en/documentview/productdocument/index/doc_url/L01QMTU4NF9yMS4wLnBkZg%3D%3D/release_date/MjAwOS0wNC0wOSAwMDowMDowMA%3D%3D/, Device Class L1="Integrated Circuits (ICs)", Device Class L2="Power Management ICs", Device Class L3="Voltage Regulators - Switching", Digikey Description="IC REG BUCK ADJ 3A", Height=1.7mm, Ipc Land Pattern Name=SOIC127P600X150-8, Lead Free=Yes, Manufacturer Part Number=MP1584EN-LF-Z, Number Of Outputs=1, Octopart=https://octopart.com/mp1584en-lf-z-monolithic+power+systems-18629680, Output Type=AdjustableProgrammable, Package=MP1584EN-LF-Z, RoHS=TRUE, Standoff Height=0mm, Switching Topology=Buck, Temperature Range High=+125°C, Temperature Range Low=-20°C
U2 U3 U4: library part CMP-0859-00383-4, "IC INVERTER 1CH 1-INP SC70-5", Ambient Temperature Range High=+125°C, Ambient Temperature Range Low=-40°C, Manufacturer="Texas Instruments", Max Junction Temp=+150°C, Max Supply Voltage=5.5V, Min Supply Voltage=2V, Nominal Supply Current=1uA, Package=DCK0005A, Temperature="-40°C to +125°C", Automotive=No, Category=IC, ComponentLink2Description=Datasheet, ComponentLink2URL=http://www.ti.com/lit/ds/symlink/sn74ahc1g04.pdf, Device Class L1="Integrated Circuits (ICs)", Device Class L2="Logic ICs", Device Class L3="Logic Gates", Digikey Description="IC INVERTER 1CH 1-INP SC70-5", Height=1.1mm, Lead Free=Yes, Logic Function Desc=Inverting, Manufacturer Part Number=SN74AHC1G04DCKR, Mouser Description="Inverter 1 Element CMOS 5-Pin SC-70 Tape and Reel", Number of Circuits=1, Number Of Inputs=1, Number Of Outputs=1, Octopart=https://octopart.com/sn74ahc1g04dckr-texas+instruments-464403, RoHS=TRUE, Standoff Height=0mm, Temperature Range High=+125°C, Temperature Range Low=-40°C
U5: library part CMP-12757-000001-1, "IC REG BUCK 5V 2A TSOT26", Ambient Temperature Range High=+85°C, Ambient Temperature Range Low=-40°C, Manufacturer="Diodes Inc.", Max Junction Temp=+160°C, Max Supply Voltage=32V, Min Supply Voltage=3.8V, Nominal Supply Current=22uA, Output Current=2A, Output Voltage=5V, Package=TSOT26, Switching Frequency=1100kHz, Temperature="-40°C to +85°C", Automotive=No, Category=IC, ComponentLink2Description=Datasheet, ComponentLink2URL=https://www.diodes.com/assets/Datasheets/AP63200-AP63201-AP63203-AP63205.pdf, Device Class L1="Integrated Circuits (ICs)", Device Class L2="Power Management ICs", Device Class L3="Voltage Regulators - Switching", Digikey Description="IC REG BUCK 5V 2A TSOT26", Footprint Url=https://www.diodes.com/assets/Package-Files/TSOT26.pdf, Height=1mm, Lead Free=Yes, Manufacturer Part Number=AP63205WU-7, Max Duty Cycle=100%, Number Of Outputs=1, Octopart=https://octopart.com/ap63205wu-7-diodes+inc.-98099551, Output Type=Fixed, RoHS=TRUE, Standoff Height=0.01mm, Switching Topology=Buck, Temperature Range High=+85°C, Temperature Range Low=-40°C

## Via types
v1: diameter 0.61, hole 0.305, Top Layer to Bottom Layer, tented both sides, 188 vias
v2: diameter 0.914, hole 0.457, Top Layer to Bottom Layer, tented both sides, 23 vias
v3: diameter 0.305, hole 0.305, Top Layer to Bottom Layer, tented both sides, 10 vias
v4: diameter 1.27, hole 0.711, Top Layer to Bottom Layer, tented both sides, 9 vias

## Nets (pads, with @x,y where several pads share a name; then routed paths per layer and width w, separated by ;. In a path a pad name is that pad's centre, name@x,y a point inside that pad or via, vN(x,y) a via of type N, cw(c..) or ccw(c..) an arc to the next point about the centre after c; other vN are vias at no path point)
5V: C9.2 C10.2 L2.2 P1.6 P3.6 P6.6 U2.5 U3.5 U4.5 U5.1 | length 136.4
  Top Layer w0.381: v1(-48.514,3.556) -48.514,-0.381 P1.6@-47.117,-1.778
  Top Layer w0.762: P3.6@-58.039,-1.778 -52.451,-7.366 -47.117,-7.366 ; P1.6@-47.117,-1.778 -47.117,-7.366 ; P6.6@-7.239,-1.651 -17.018,-1.651 -18.034,-0.635 -32.766,-0.635 -39.497,-7.366 -47.117,-7.366
  Bottom Layer w0.381: L2.2@-63.627,3.071 -63.052,3.071 -62.067,4.056 -62.067,4.1 -59.563,6.604 -56.896,6.604 -54.442,9.058 U3.5@-54.442,12.035 ; v1(-48.514,3.556) -48.514,5.715 -47.371,6.858 -45.593,6.858 -43.307,9.144 -43.307,12.041 -43.316,12.05 U2.5@-43.477,12.05 ; P6.6@-7.239,-1.651 -8.636,-0.254 -8.636,5.842 -7.62,6.858 -5.969,6.858 -3.429,9.398 -3.429,12.168 -3.438,12.177 U4.5@-3.599,12.177
  Bottom Layer w0.635: U5.1@-68.011,9.076 -68.011,6.739 C9.2@-68.273,6.477 C10.2@-68.273,3.937 -65.068,3.937 -64.202,3.071 L2.2@-63.627,3.071
  Bottom Layer w1.27: C10.2@-68.273,3.937 -68.273,1.344 -65.151,-1.778 P3.6@-58.039,-1.778
12V: C5.2 L1.2 P1.4 P3.4 P6.4 R4.2 | length 106.2
  Top Layer w0.381: v1(9.271,12.192) 9.271,18.034 10.795,19.558 v1(13.462,19.558)
  Top Layer w1.27: v4(-44.577,-5.461) P1.4@-44.577,-1.778 ; v4(-4.699,-5.842) P6.4@-4.699,-1.651 ; v4(8.509,-3.302) v4(8.509,0.635)
  Bottom Layer w0.381: C5.2@8.255,2.614 8.005,2.614 7.545,3.074 6.858,3.761 6.858,8.128 9.271,10.541 v1(9.271,12.192) ; R4.2@13.462,18.684 v1(13.462,19.558)
  Bottom Layer w1.27: P3.4@-55.499,-1.778 -51.816,-5.461 v4(-44.577,-5.461) -38.1,-5.461 -34.925,-2.286 -16.002,-2.286 -12.446,-5.842 -3.937,-5.842 -1.397,-3.302 v4(8.509,-3.302) ; C5.2@8.255,2.614 8.494,2.614 8.509,2.599 v4(8.509,0.635)
24V: C1.2 C2.2 C4.2 C8.2 J2.1 P1.2 P3.2 P6.2 R2.1 U1.7 U5.2 U5.3 | length 144.6
  Bottom Layer w0.635: C8.2@-71.501,9.129 -69.944,9.129 -69.911,9.096 U5.3@-69.911,9.076 U5.2@-68.961,9.076 -68.994,9.043 -68.994,8.349 -69.723,7.62 -69.723,0.762 -65.786,-3.175 -57.404,-3.175 -56.769,-2.54 -56.769,-1.143 -56.134,-0.508 -54.229,-0.508 P3.2@-52.959,-1.778 ; U1.7@16.995,13.208 C4.2@19.797,13.208 ; C4.2@19.804,13.238 19.804,13.357 19.827,13.379 R2.1@19.827,14.732 ; 23.114,8.89 23.226,8.778 C1.2@25.273,8.778 C2.2@26.924,8.778 26.924,10.795 28.956,12.827 J2.1@28.956,13.208
  Bottom Layer w1.016: P3.2@-52.959,-1.778 -51.054,-3.683 -41.783,-3.683 ; P1.2@-42.037,-1.778 -42.037,-3.429 -41.783,-3.683 ; R2.1@19.827,14.732 22.479,14.732 23.114,14.097 23.114,8.89 23.114,2.794 18.415,-1.905 -1.774,-1.905 -1.903,-1.776 -2.028,-1.651 P6.2@-2.159,-1.651 -2.252,-1.744 -2.252,-2.125 -3.683,-3.556 -12.446,-3.556 -15.24,-0.762 -35.941,-0.762 -38.862,-3.683 -41.783,-3.683
#A1: J17.1 J21.1 | length 18.4
  Top Layer w0.635: J17.1@52.468,4.953 53.975,3.446 53.975,-0.127 53.467,-0.635 53.467,-4.766 J21.1@58.988,-10.287
#A2: J17.2 J21.2 | length 20.4
  Top Layer w0.635: J17.2@55.468,4.953 56.896,3.525 56.896,1.27 54.483,-1.143 54.483,-4.191 58.801,-8.509 59.656,-8.509 61.488,-10.341 J21.2@61.488,-10.414
#B1: J17.3 J21.3 | length 17.7
  Top Layer w0.635: J17.3@58.468,4.953 58.468,4.714 58.911,4.271 58.911,4.255 59.944,3.221 59.944,-5.969 63.988,-10.013 J21.3@63.988,-10.414
#B2: J17.4 J21.4 | length 17.4
  Top Layer w0.635: J17.4@61.468,4.953 62.865,3.556 62.865,-6.35 66.488,-9.973 J21.4@66.488,-10.414
#Endstop_X_A: J15.1 J17.5 | length 17
  Top Layer w0.381: v1(61.595,7.62) 62.109,7.62 64.468,5.261 J17.5@64.468,4.953
  Bottom Layer w0.381: J15.1@56.047,-2.667 56.047,-2.373 59.69,1.27 59.69,6.223 61.087,7.62 v1(61.595,7.62)
#Endstop_X_B: J15.2 J17.6 | length 17.9
  Top Layer w0.381: J15.2@58.547,-2.667 J15.2@58.63,-2.584 ; v1(64.008,6.858) 65.563,6.858 J17.6@67.468,4.953
  Bottom Layer w0.381: J15.2@58.547,-2.667 58.547,-2.413 60.198,-0.762 60.198,5.969 61.087,6.858 v1(64.008,6.858)